# Altium PCB PCB.PcbDoc
Units mm, origin at the board's own origin, x right, y up, seen from the top; angles counter-clockwise.
Board outline 95.1 x 85.5 mm, 4 copper layers (Signal Top, Int1 (GND), Int2 (PWR), Signal Bottom), stack 1.696 mm thick; 125 components, 91 nets, 430 pads, 70 vias.
Unrouted connection lines stored in the file: 163.
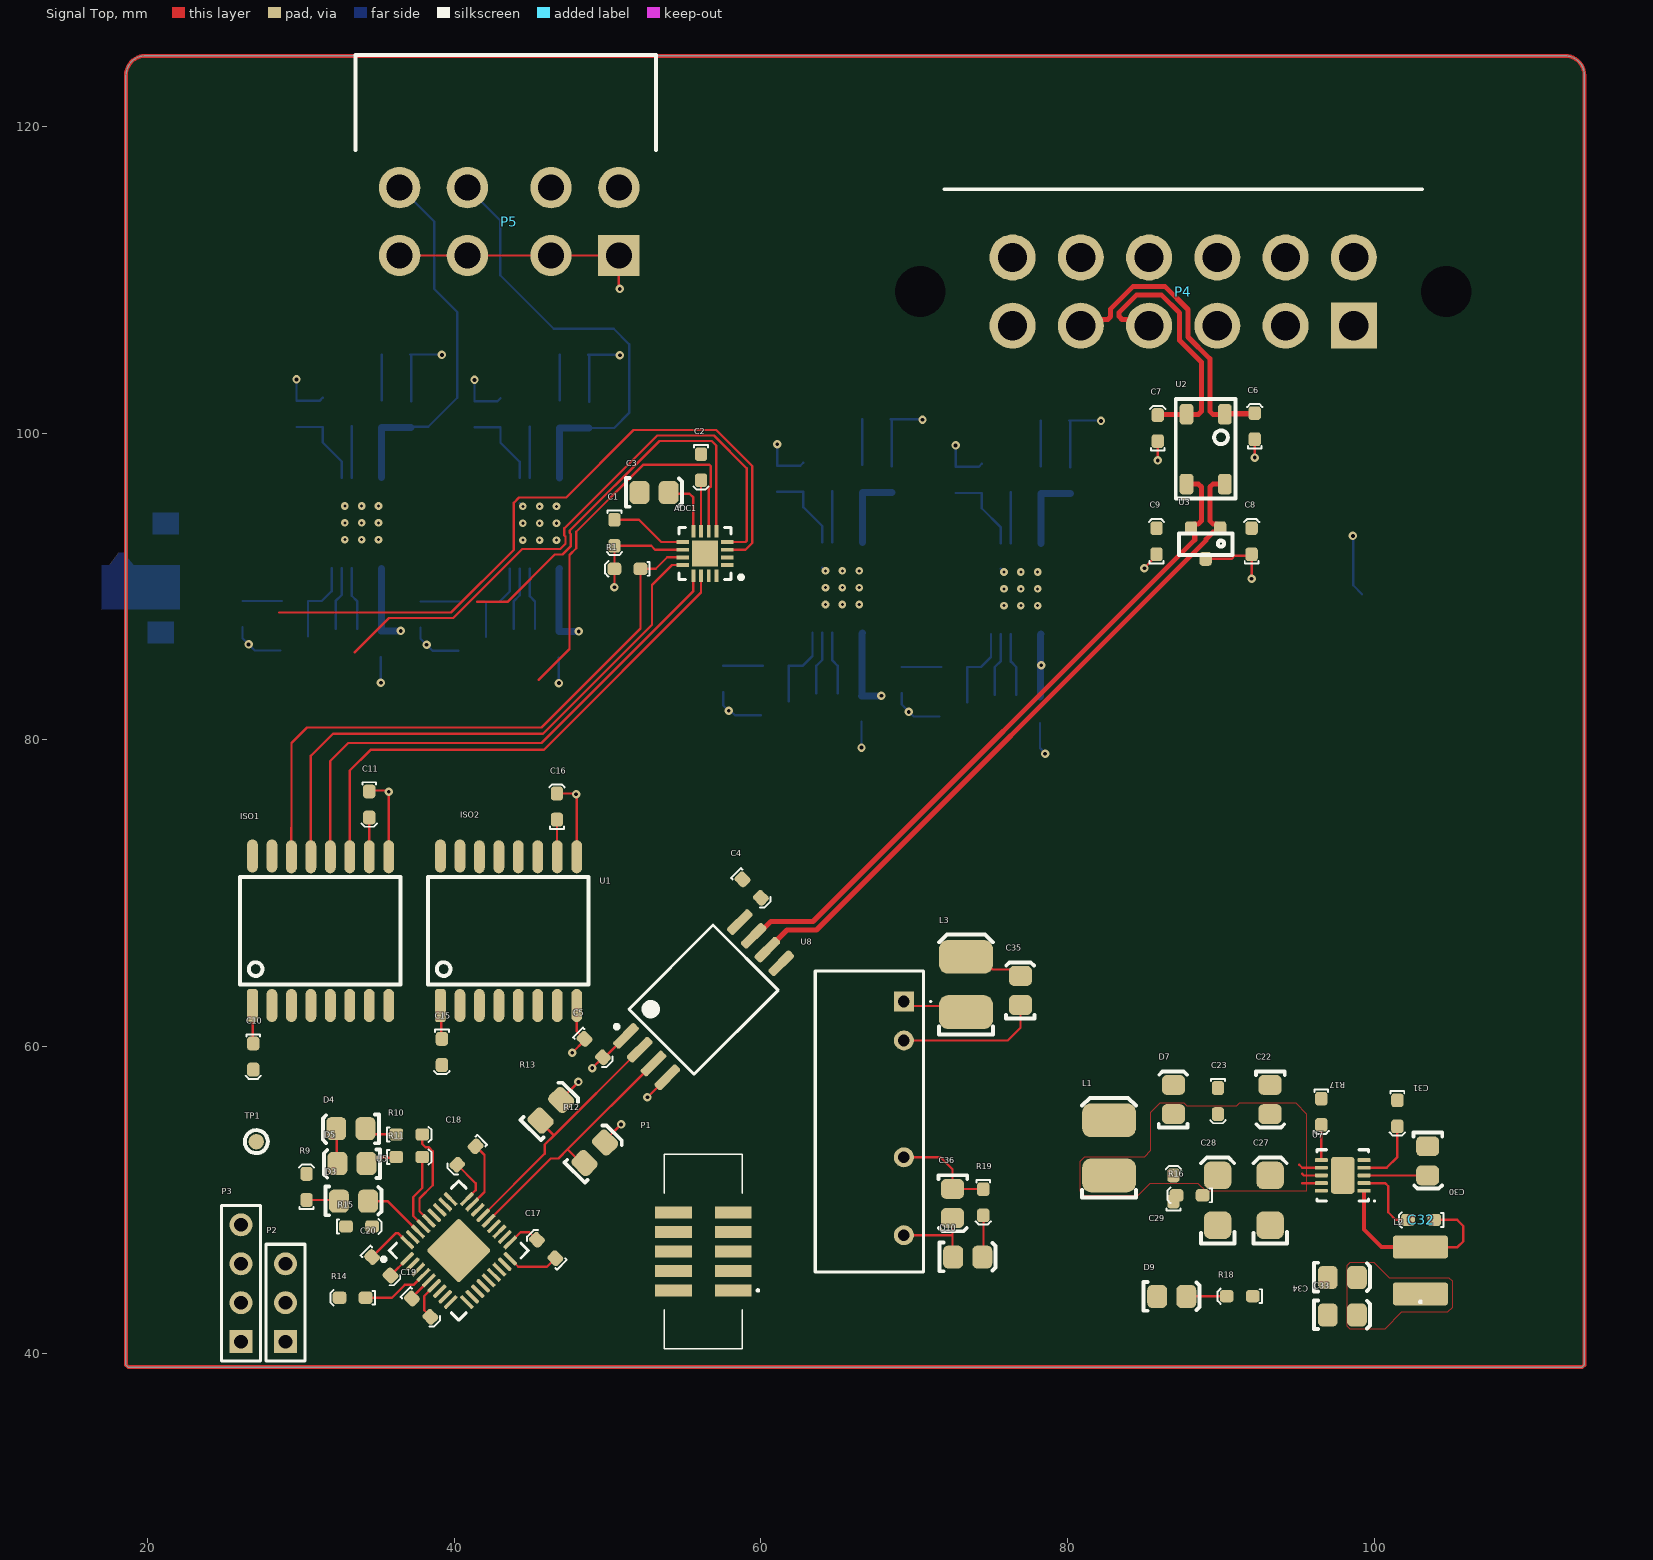
[diagram p0: Signal Top view]
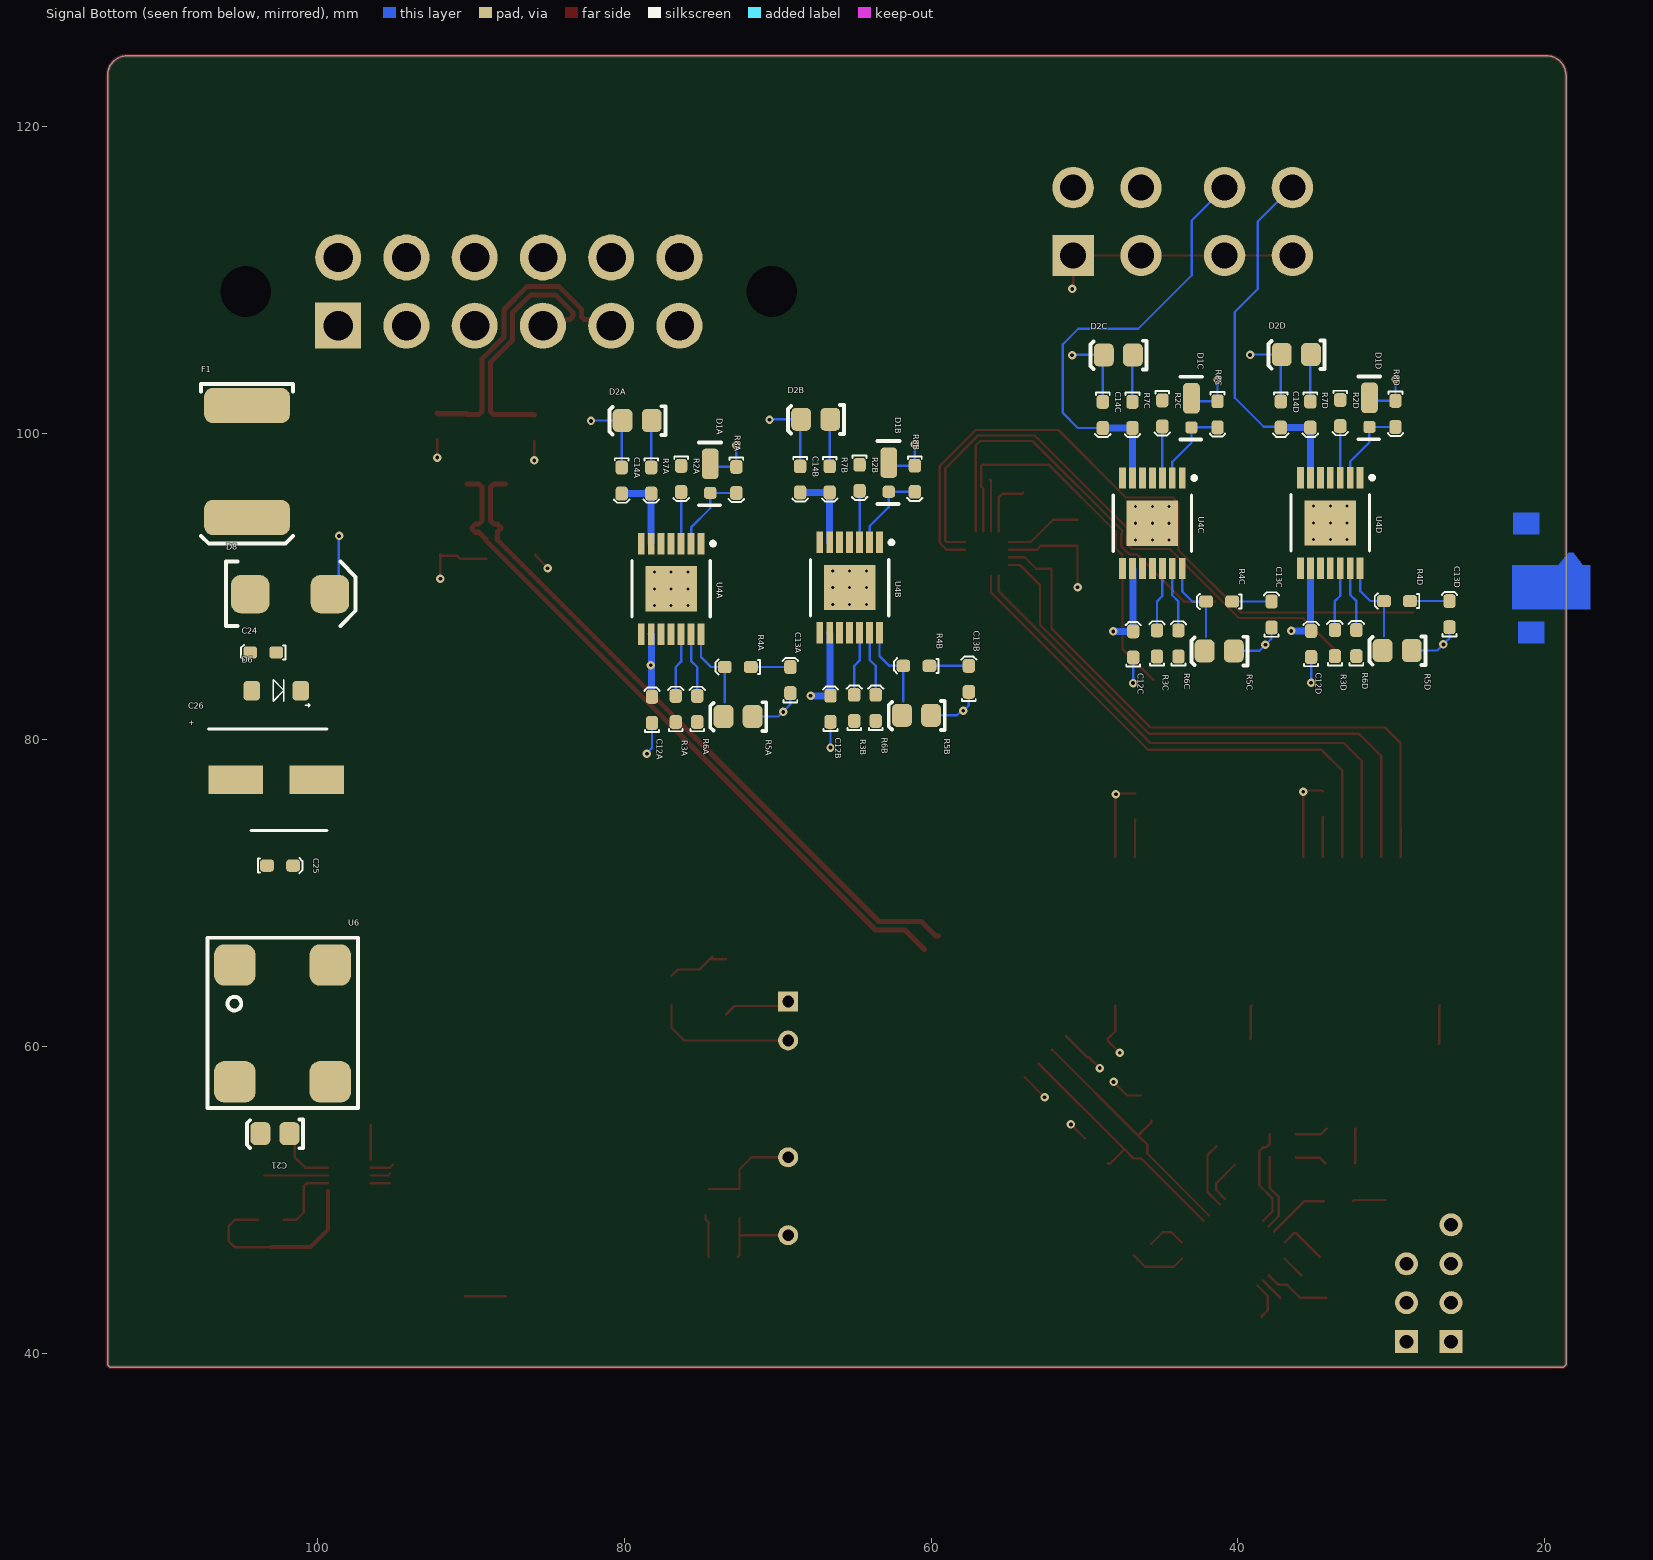
[diagram p1: Signal Bottom view, seen from below]
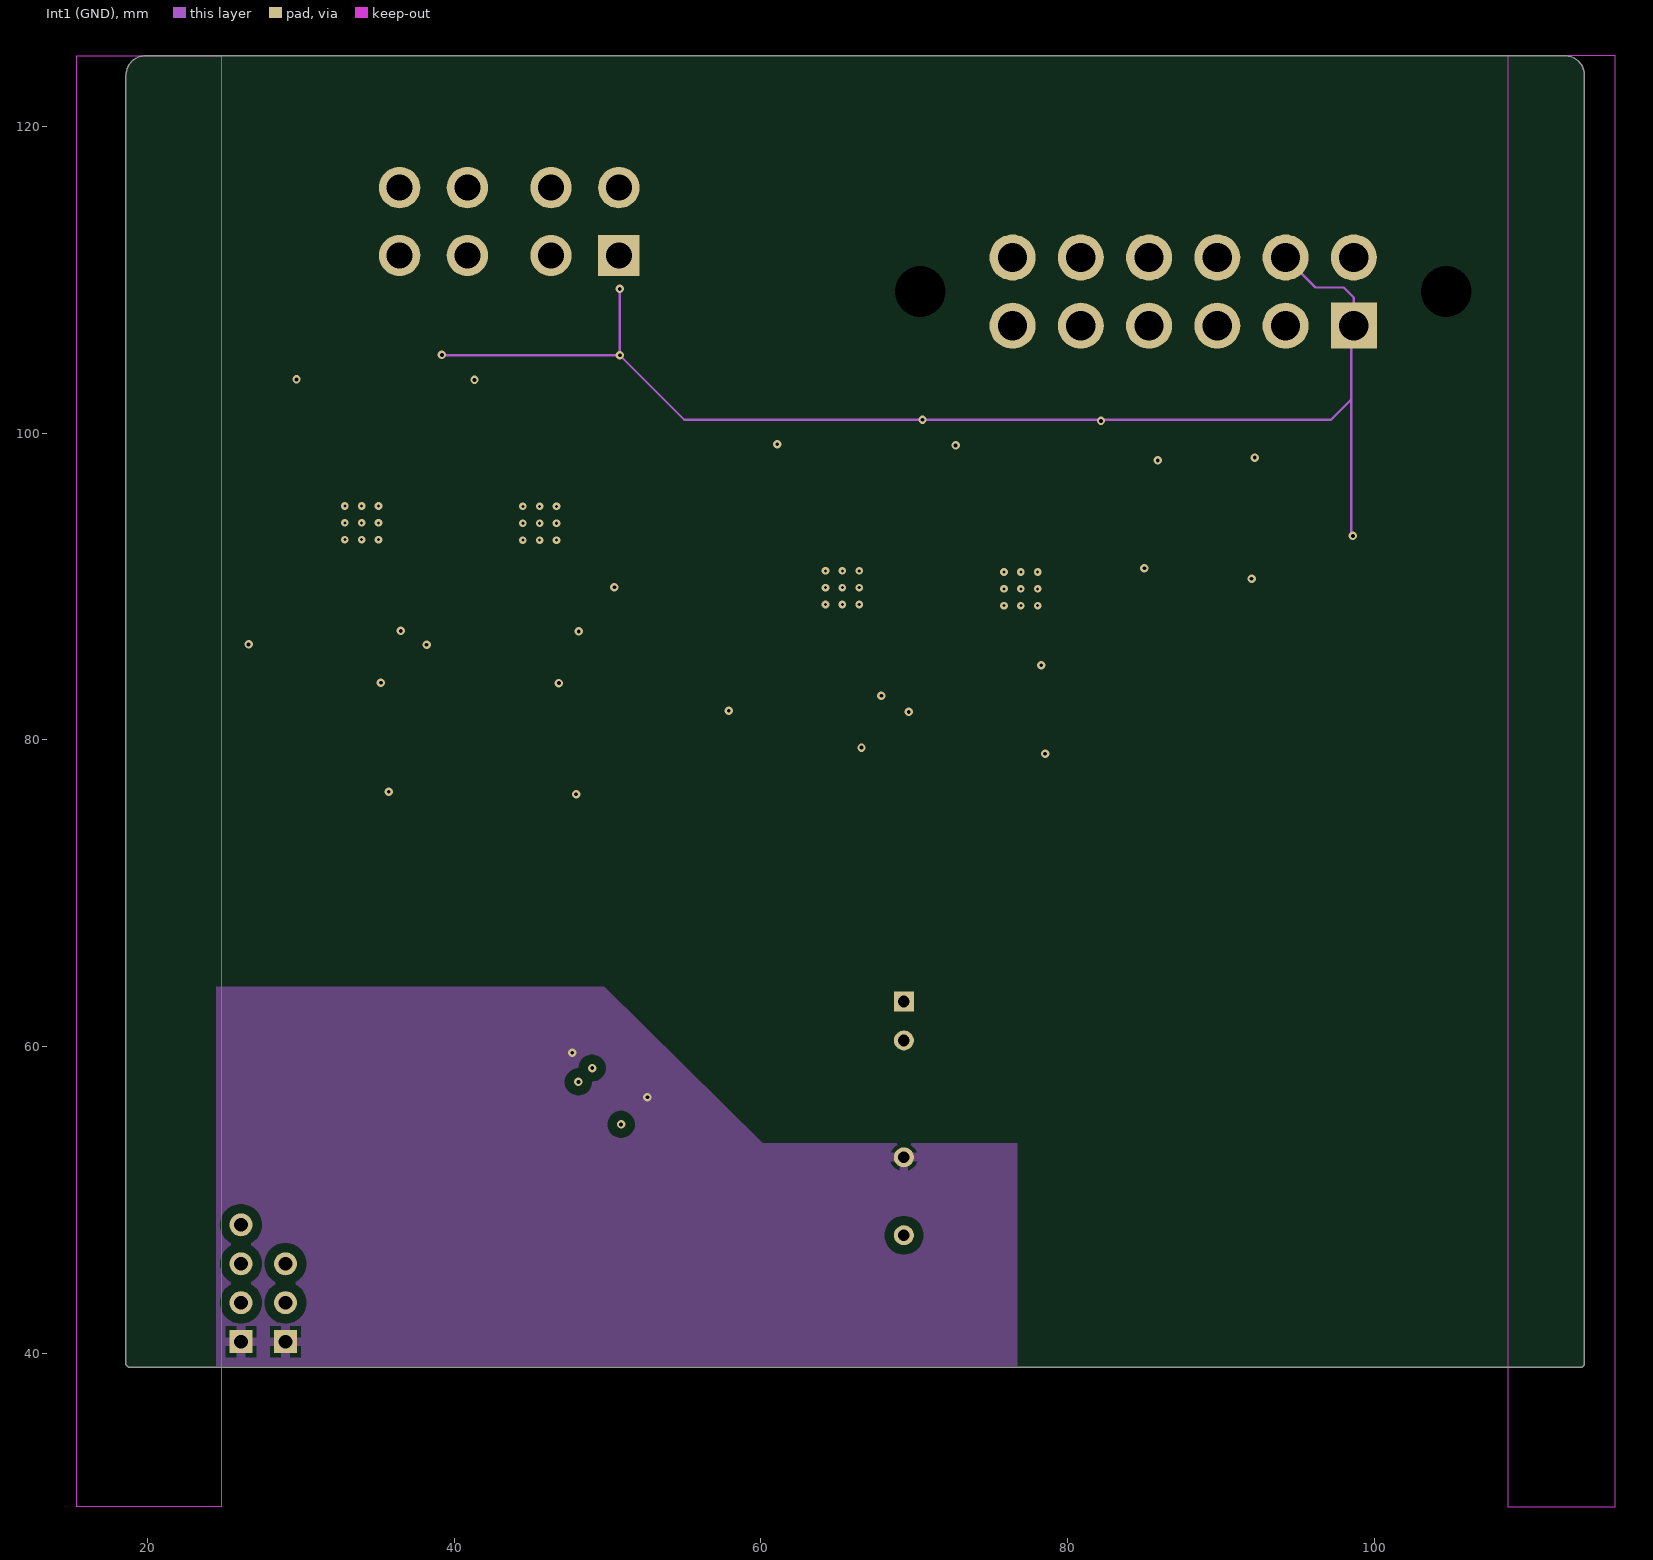
[diagram p2: Int1 (GND)]
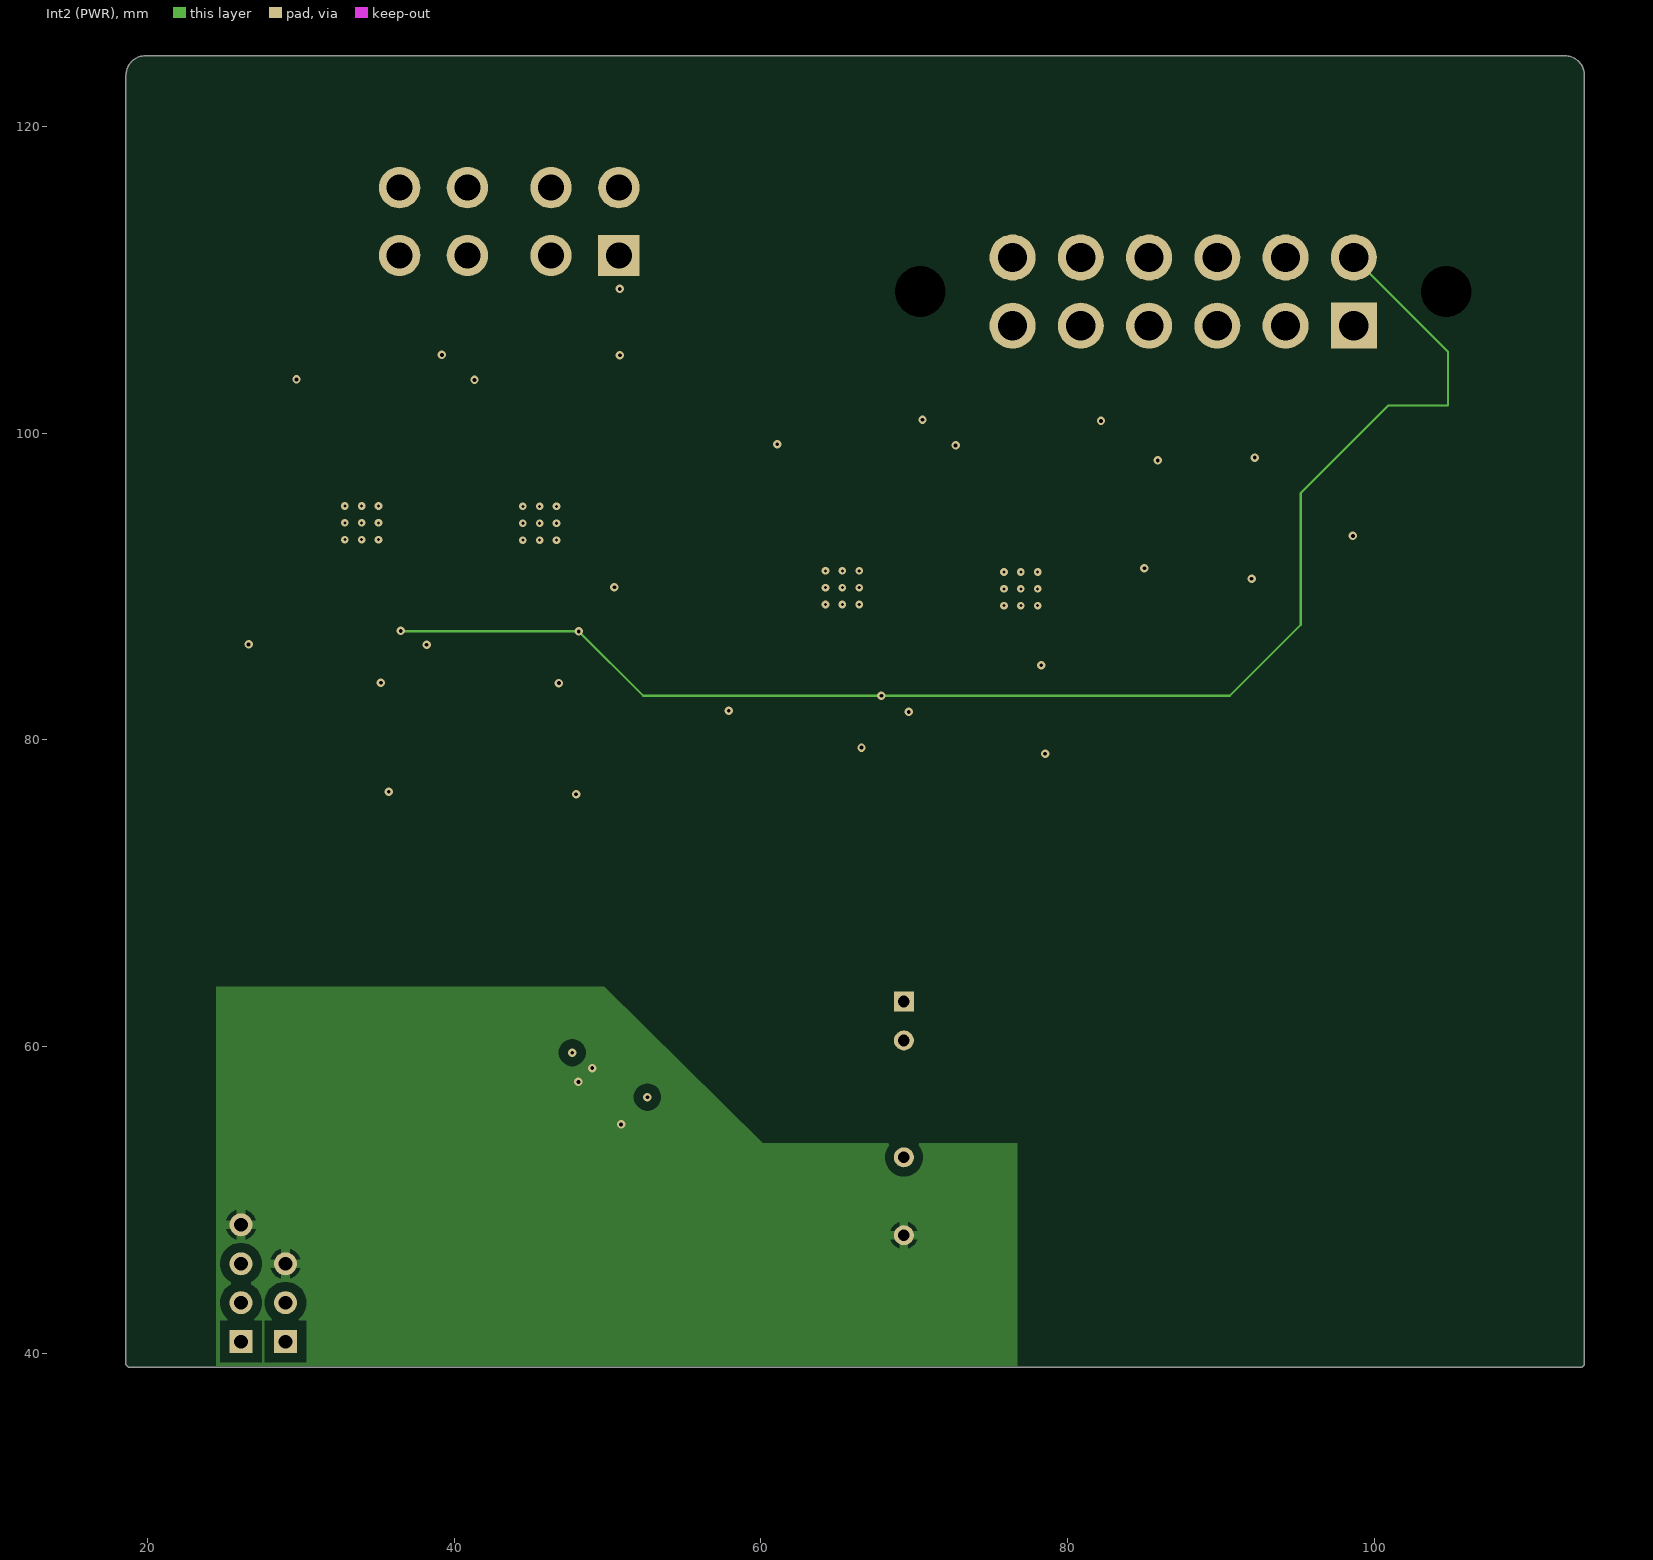
[diagram p3: Int2 (PWR)]

## Layer stack, top to bottom
Top Solder: solder mask 0.0254, SM-003, Dk 4
Signal Top: signal copper 0.07
Dielectric 1: prepreg 0.2104, PP-017, Dk 4.4
Int1 (GND): signal copper 0.035
Dielectric 2: core 1.065, Core-039, Dk 4.5
Int2 (PWR): signal copper 0.035
Dielectric 3: prepreg 0.2104, PP-017, Dk 4.4
Signal Bottom: signal copper 0.07
Bottom Solder: solder mask 0.0254, SM-003, Dk 4

## Board outline
18.749,39.1 18.6,39.249 18.6,123.33 cw(c19.87,123.33) 19.87,124.6 112.43,124.6 cw(c112.43,123.33) 113.7,123.33 113.7,39.249 113.551,39.1

## Design rules (kind name [scope] priority, off if disabled: settings)
Clearance [All] p1: gap=0.254 ignorepadtopadclearanceinfootprint=FALSE except(0: Arc-Hole Track-Hole SMDPad-Hole THPad-Hole Via-Hole Fill-Hole Region-Hole Text-Hole; 0.1: THPad-THPad; 0.152: Arc-SMDPad Track-SMDPad SMDPad-SMDPad; 0.2: Arc-THPad Track-THPad SMDPad-THPad THPad-Via; 0.203: Arc-Arc Arc-Track Arc-Region Track-Track Track-Region SMDPad-Region THPad-Region Via-Region Fill-Region Poly-Region Region-Region; 0.6: Arc-Poly Track-Poly SMDPad-Poly THPad-Poly Via-Poly Fill-Poly Poly-Poly)
DiffPairsRouting [All] p1: maxlimit=0.22 minlimit=0.22 mostfreqgap=0.22 toplayer_minwidth=0.33 toplayer_maxwidth=0.33 toplayer_prefwidth=0.33 midlayer1_minwidth=0.33 midlayer1_maxwidth=0.33 midlayer1_prefwidth=0.33 midlayer2_minwidth=0.33 midlayer2_maxwidth=0.33 midlayer2_prefwidth=0.33 bottomlayer_minwidth=0.33 bottomlayer_maxwidth=0.33 bottomlayer_prefwidth=0.33 maxuncoupledlength=12.7
Height [All] p1: minheight=0 maxheight=50 prefheight=12.7
HoleSize [All] p1: absolutevalues=TRUE maxlimit=10 minlimit=0.025 maxpercent=80.000 minpercent=20.000
MinimumSolderMaskSliver [All] p1 off: minsoldermaskwidth=0.254
NetAntennae [All] p1 off: netantennaetolerance=0
PlaneClearance [All] p1: clearance=0.4
PlaneConnect [All] p1: pad.planeconnectstyle=Relief pad.reliefexpansion=0.508 pad.reliefentries=4 pad.reliefconductorwidth=0.8 pad.reliefairgap=0.254 via.planeconnectstyle=Direct via.reliefexpansion=0.508 via.reliefentries=4 via.reliefconductorwidth=0.8 via.reliefairgap=0.254
PolygonConnect [All] p1: thpad.connectstyle=Relief thpad.reliefconductorwidth=0.6 thpad.reliefentries=4 thpad.polygonreliefangle="90 Angle" thpad.airgapwidth=0.254 smdpad.connectstyle=Relief smdpad.reliefconductorwidth=0.6 smdpad.reliefentries=4 smdpad.polygonreliefangle="90 Angle" smdpad.airgapwidth=0.254 via.connectstyle=Direct via.reliefconductorwidth=0.6 via.reliefentries=4 via.polygonreliefangle="90 Angle" via.airgapwidth=0.254
RoomDefinition "IPT FILTER + PROC" [InComponentClass('Power Supply')] p1: confinementstyle=ConfineIn formatcopy=TRUE lockcomponents=FALSE outline 96.9,55.6 116.2,55.6 116.2,103.6 96.9,103.6
RoomDefinition "24V-5V REG" [InComponentClass('Power Supply2')] p2: confinementstyle=ConfineIn formatcopy=TRUE lockcomponents=FALSE outline 107.4,41.1 107.4,58.8 80.5,58.8 80.5,41.1
RoomDefinition CAN [InComponentClass('CAN')] p3: confinementstyle=ConfineIn formatcopy=TRUE lockcomponents=FALSE outline 46.66,50.96 58.9,63.2 61.5,60.6 87.91,86.337 87.959,89.8 84.4,89.8 84.4,102.5 93.6,102.5 93.6,89.8 90.1,89.8 90.1,85.5 62.3,57.7 64,56 53.011,45.011
RoomDefinition HSD1D [InComponentClass('HSD1D')] p4: confinementstyle=ConfineIn formatcopy=TRUE lockcomponents=TRUE outline 25.4,86.6 28.7,83.3 36.1,83.3 37,84.2 37,98.5 39.7,101.2 39.7,105.8 39.2,106.3 31.6,106.3 28.8,103.5 28.8,93.1 25.4,89.7
RoomDefinition HSD1A [InComponentClass('HSD1A')] p5: confinementstyle=ConfineIn formatcopy=TRUE lockcomponents=FALSE outline 68.377,82.3 71.677,79 79.077,79 79.977,79.9 79.977,94.2 82.677,96.9 82.677,101.5 82.177,102 74.577,102 71.777,99.2 71.777,88.8 68.377,85.4
RoomDefinition Microcontroller [InComponentClass('Microcontroller')] p6: confinementstyle=ConfineIn formatcopy=TRUE lockcomponents=FALSE outline 24.376,38.956 24.376,49.824 25.969,54.931 31.067,55.956 46.915,58.343 61.154,54.294 61.154,38.986 27.624,38.956
RoomDefinition 5V-3V3 [InComponentClass('Power Supply1')] p7: confinementstyle=ConfineIn formatcopy=TRUE lockcomponents=FALSE outline 62.2,43.9 78.3,43.9 78.3,67.7 62.2,67.7
RoomDefinition HSD1B [InComponentClass('HSD1B')] p8: confinementstyle=ConfineIn formatcopy=TRUE lockcomponents=FALSE outline 56.739,82.374 60.039,79.074 67.439,79.074 68.339,79.974 68.339,94.274 71.039,96.974 71.039,101.574 70.539,102.074 62.939,102.074 60.139,99.274 60.139,88.874 56.739,85.474
RoomDefinition HSD1C [InComponentClass('HSD1C')] p9: confinementstyle=ConfineIn formatcopy=TRUE lockcomponents=FALSE outline 37.003,86.574 40.303,83.274 47.703,83.274 48.603,84.174 48.603,98.474 51.303,101.174 51.303,105.774 50.803,106.274 43.203,106.274 40.403,103.474 40.403,93.074 37.003,89.674
RoomDefinition "High-Side Driver Enable Pin Isolator" [InComponentClass('High-Side Driver Enable Pin Isolator')] p10: confinementstyle=ConfineIn formatcopy=TRUE lockcomponents=FALSE outline 37.909,60.671 37.909,74.433 45.869,77.431 47.531,77.431 49.135,74.433 49.135,60.671 40.031,57.869 38.369,57.869
RoomDefinition ADC1 [InComponentClass('ADC1')] p11: confinementstyle=ConfineIn formatcopy=TRUE lockcomponents=FALSE outline 49.55,97.35 51.65,99.45 57.75,99.45 59.05,98.15 59.05,89.75 58.15,88.85 50.55,88.85 50.55,88.95 49.55,89.95
RoomDefinition TopLevel [InComponentClass('TopLevel')] p12: confinementstyle=ConfineIn formatcopy=TRUE lockcomponents=FALSE outline 24.963,109.038 24.963,139.446 108.589,139.446 108.589,104.648 66.501,104.648 66.501,109.038
RoomDefinition "Contoller Peripheral Comms Isolation" [InComponentClass('Contoller Peripheral Comms Isolation')] p13: confinementstyle=ConfineIn formatcopy=TRUE lockcomponents=FALSE outline 25.651,60.671 25.651,74.433 33.634,77.553 35.296,77.553 36.878,74.433 36.878,60.671 27.731,57.569 26.069,57.569
RoutingVias [All] p1: holewidth=0.25 width=0.55 viastyle="Through Hole" minholewidth=0.203 minwidth=0.254 maxholewidth=0.711 maxwidth=1.27
SilkToSilkClearance [All] p1 off: silktosilkclearance=0.254
SilkToSolderMaskClearance [IsPad] p1 off: minsilkscreentomaskgap=0.254 clearancetoexposedcopper=TRUE
SolderMaskExpansion [All] p1: expansion=0.051 istentingtop=FALSE
SupplyNets "Schematic Supply Nets_8" [InNet('0V')] p1: voltage=0.000
SupplyNets "Schematic Supply Nets_7" [InNet('3V3')] p2: voltage=0.000
SupplyNets "Schematic Supply Nets_6" [InNet('0V_(ISO)')] p3: voltage=0.000
SupplyNets "Schematic Supply Nets_5" [InNet('VBAT_F')] p4: voltage=0.000
SupplyNets "Schematic Supply Nets_4" [InNet('VBAT_C')] p5: voltage=0.000
SupplyNets "Schematic Supply Nets_3" [InNet('GLV+')] p6: voltage=0.000
SupplyNets "Schematic Supply Nets_2" [InNet('5V')] p7: voltage=0.000
SupplyNets "Schematic Supply Nets_1" [InNet('GLV-')] p8: voltage=0.000
SupplyNets "Schematic Supply Nets" [InNet('VBAT_D')] p9: voltage=0.000
Width [All] p1: maxlimit=3 minlimit=0.127 preferedwidth=0.152 minimp=50.000000 maximp=50.000000 favimp=50.000000
21 further rules are at their usual default settings.

## Classes and differential pairs
component class "Power Supply2": C22 C23 C27 C28 C29 C30 C31 C32 C33 C34 D7 D9 L1 L2 R17 R18 U7
component class "Power Supply1": C35 C36 D10 L3 R19 U8
component class HSD1C: C12C C13C C14C D1C D2C R2C R3C R4C R5C R6C R7C R8C U4C
component class HSD1B: C12B C13B C14B D1B D2B R2B R3B R4B R5B R6B R7B R8B U4B
component class HSD1A: C12A C13A C14A D1A D2A R2A R3A R4A R5A R6A R7A R8A U4A
component class ADC1: ADC1 C1 C2 C3 R1
channel class "High-Side Driver": HSD1A HSD1B HSD1C HSD1D
component class TopLevel: P4 P5
component class "Power Supply": C21 C24 C25 C26 D6 D8 F1 R16 U6
component class Microcontroller: C17 C18 C19 C20 D3 D4 D5 P1 P2 P3 R9 R10 R11 R12 R13 R14 R15 TP1 U5
component class HSD1D: *_HSD2 C12D C13D C14D D1D D2D R2D R3D R4D R5D R6D R7D R8D U4D
component class "High-Side Driver Enable Pin Isolator": C15 C16 ISO2
component class "Contoller Peripheral Comms Isolation": C10 C11 ISO1
component class CAN: C4 C5 C6 C7 C8 C9 U1 U2 U3
differential pair CAN1: +CAN1_P -CAN1_N
differential pair _CAN1: +_CAN1_P -_CAN1_N

## Components (designator, comment, footprint, x,y, rotation, side; value= is the part's Value field where it differs from the comment)
ADC1 "ADS7028IRTER-Symbol-1" WFQN-16 56.35,92.15 r180 top
C1 "100nF" 0603 50.45,94.35 r270 top
C2 "100nF" 0603 56.1,98.625 r270 top
C3 "1µF" 0805 53.05,96.15 r0 top
C4 "100nF" 0603 58.8,70.9 r315 top
C5 "100nF" 0603 48.5,60.5 r315 top
C6 "100pF" 0603 92.2,99.6 r90 top
C7 "100pF" 0603 85.875,99.475 r90 top
C8 "100pF" 0603 92,92.1 r90 top
C9 "100pF" 0603 85.8,92.1 r90 top
C10 "100nF" 0603 26.9,60.2 r270 top
C11 "100nF" 0603 34.465,76.635 r270 top
C12A "100nF" 0603 78.2,81.1 r90 bottom (schematic designator C12)
C12B "100nF" 0603 66.562,81.174 r90 bottom (schematic designator C12)
C12C "100nF" 0603 46.826,85.374 r90 bottom (schematic designator C12)
C12D "100nF" 0603 35.223,85.4 r90 bottom (schematic designator C12)
C13A "100nF" 0603 69.177,83.05 r90 bottom (schematic designator C13)
C13B "100nF" 0603 57.539,83.124 r90 bottom (schematic designator C13)
C13C "100nF" 0603 37.803,87.324 r90 bottom (schematic designator C13)
C13D "100nF" 0603 26.2,87.35 r90 bottom (schematic designator C13)
C14A "22nF" 0603 80.177,97.761 r270 bottom (schematic designator C14)
C14B "22nF" 0603 68.539,97.835 r270 bottom (schematic designator C14)
C14C "22nF" 0603 48.803,102.035 r270 bottom (schematic designator C14)
C14D "22nF" 0603 37.2,102.061 r270 bottom (schematic designator C14)
C15 "100nF" 0603 39.2,60.5 r270 top
C16 "100nF" 0603 46.7,74.8 r90 top
C17 "100nF" 0603 46.6,46.2 r135 top
C18 "100nF" 0603 41.4,53.5 r225 top
C19 "100nF" 0603 37.248,43.577 r315 top
C20 "100nF" 0603 34.648,46.277 r315 top
C21 "10uF" 0805 102.8,54.3 r0 bottom
C22 "10uF" 0805 93.226,56.538 r270 top
C23 "100nF" 0603 89.8,57.3 r270 top
C24 "100nF" 0603 102.7,85.7 r0 bottom
C25 "100nF" 0603 103.3,71.8 r180 bottom
C26 "47uF" "CHEMI-CON ELCO" 102.7,77.4 r180 bottom
C27 "4.7uF" "1206 CAP" 93.205,51.16 r90 top
C28 "4.7uF" "1206 CAP" 89.78,51.16 r90 top
C29 "100nF" 0603 86.9,49.9 r90 top
C30 "1µF" 0805 103.5,52.538 r270 top
C31 "10nF" 0603 101.5,56.5 r270 top
C32 "100nF" 0603 103.9,48.7 r180 top
C33 "10uF" 0805 97.923,42.525 r0 top
C34 "10uF" 0805 97.923,44.975 r0 top
C35 "10uF" 0805 76.9,63.675 r90 top
C36 "10uF" 0805 72.524,49.762 r270 top
D1A "MSX1PJ-M3/89A" "VISHAY DO-219" 74.4,98 r270 bottom (schematic designator D1)
D1B "MSX1PJ-M3/89A" "VISHAY DO-219" 62.762,98.074 r270 bottom (schematic designator D1)
D1C "MSX1PJ-M3/89A" "VISHAY DO-219" 43.026,102.274 r270 bottom (schematic designator D1)
D1D "MSX1PJ-M3/89A" "VISHAY DO-219" 31.423,102.3 r270 bottom (schematic designator D1)
D2A "Green" "0805 LED" 79.177,100.8 r0 bottom (schematic designator D2)
D2B "Green" "0805 LED" 67.539,100.874 r0 bottom (schematic designator D2)
D2C "Green" "0805 LED" 47.803,105.074 r0 bottom (schematic designator D2)
D2D "Green" "0805 LED" 36.2,105.1 r0 bottom (schematic designator D2)
D3 "Yellow" "0805 LED" 33.45,49.95 r0 top
D4 "Yellow" "0805 LED" 33.25,54.625 r180 top
D5 "Yellow" "0805 LED" 33.325,52.35 r180 top
D6 "PMEG100T10ELR-QX" "NXP SOD123W" 102.7,83.2 r0 bottom
D7 "Red" "0805 LED" 86.874,56.562 r90 top
D8 "SM6T36CAY" "ST SMB DIODE" 101.8,89.5 r0 bottom
D9 "Red" "0805 LED" 86.802,43.726 r0 top
D10 "Red" "0805 LED" 73.5,46.3 r0 top
F1 "0ZCF0100AF2A" 2920 104.6,101.8 r270 bottom
ISO1 "ADum1401" "AD 16-SOIC" 32.56,67.552 r0 top
ISO2 "ADuM1400" "AD 16-SOIC" 44.817,67.552 r0 top
L1 "12uH" 1812 82.7,53.4 r90 top
L2 "4.7uH" SRN3015TA-4R7M 103,45.4 r90 top
L3 "12uH" 1812 73.375,64.05 r90 top
P1 "1.27mm" 3221-10-0300-00 56.25,46.64 r90 top
P2 "2.54mm" "TH 2.54mm Header 1x3" 29,40.76 r90 top
P3 "2.54mm" "TH 2.54mm Header 1x4" 26.1,40.76 r90 top
P4 "DTF13-12P" DTF13-12P 87.545,111.452 r180 top
P5 "ATF13-08" ATF13-08 43.592,113.792 r180 top
R1 "100K" 0603 52.15,91.15 r180 top
R2A "10k" 0603 76.3,97.861 r270 bottom (schematic designator R2)
R2B "10k" 0603 64.662,97.935 r270 bottom (schematic designator R2)
R2C "10k" 0603 44.926,102.135 r270 bottom (schematic designator R2)
R2D "10k" 0603 33.323,102.161 r270 bottom (schematic designator R2)
R3A "10k" 0603 76.65,81.161 r90 bottom (schematic designator R3)
R3B "10k" 0603 65.012,81.235 r90 bottom (schematic designator R3)
R3C "10k" 0603 45.276,85.435 r90 bottom (schematic designator R3)
R3D "10k" 0603 33.673,85.461 r90 bottom (schematic designator R3)
R4A "10k" 0603 71.75,84.75 r0 bottom (schematic designator R4)
R4B "10k" 0603 60.112,84.824 r0 bottom (schematic designator R4)
R4C "10k" 0603 40.376,89.024 r0 bottom (schematic designator R4)
R4D "10k" 0603 28.773,89.05 r0 bottom (schematic designator R4)
R5A "390R" 0805 72.6,81.5 r0 bottom (schematic designator R5)
R5B "390R" 0805 60.962,81.574 r0 bottom (schematic designator R5)
R5C "390R" 0805 41.226,85.774 r0 bottom (schematic designator R5)
R5D "390R" 0805 29.623,85.8 r0 bottom (schematic designator R5)
R6A "680R" 0603 75.25,81.161 r90 bottom (schematic designator R6)
R6B "680R" 0603 63.612,81.235 r90 bottom (schematic designator R6)
R6C "680R" 0603 43.876,85.435 r90 bottom (schematic designator R6)
R6D "680R" 0603 32.273,85.461 r90 bottom (schematic designator R6)
R7A "1k" 0603 78.25,97.761 r270 bottom (schematic designator R7)
R7B "1k" 0603 66.612,97.835 r270 bottom (schematic designator R7)
R7C "1k" 0603 46.876,102.035 r270 bottom (schematic designator R7)
R7D "1k" 0603 35.273,102.061 r270 bottom (schematic designator R7)
R8A "1k" 0603 72.7,97.8 r270 bottom (schematic designator R8)
R8B "1k" 0603 61.062,97.874 r270 bottom (schematic designator R8)
R8C "1k" 0603 41.326,102.074 r270 bottom (schematic designator R8)
R8D "1k" 0603 29.723,102.1 r270 bottom (schematic designator R8)
R9 "500R" 0603 30.375,50 r90 top
R10 "500R" 0603 36.225,54.275 r0 top
R11 "500R" 0603 36.225,52.8 r0 top
R12 "5.1k" 0805 49.162,53.099 r45 top
R13 "5.1k" 0805 46.298,55.873 r45 top
R14 "10k" 0603 34.225,43.625 r180 top
R15 "10k" 0603 32.95,48.275 r0 top
R16 "20K" 0603 88.8,50.3 r180 top
R17 "100K" 0603 96.54,56.6 r270 top
R18 "2K" 0603 92.075,43.726 r180 top
R19 "1k" 0603 74.5,50.7 r270 top
TP1 "Test Point Small" "SMD Test Point 1mm" 27.1,53.8 r0 top
U1 "ISO1042" TI-SOIC-8 56.263,63.061 r45 top
U2 "B82787C0104H002" "TDK 4-PC Pad" 90.25,101.225 r270 top value="100µH @ 100kHz"
U3 "NUP2105L" "ON SOT-23" 89,92.8 r180 top
U4A "TPS1H100AQPWPRQ1" TI_14_TSSOP 76.95,89.85 r270 bottom (schematic designator U4)
U4B "TPS1H100AQPWPRQ1" TI_14_TSSOP 65.312,89.924 r270 bottom (schematic designator U4)
U4C "TPS1H100AQPWPRQ1" TI_14_TSSOP 45.576,94.124 r270 bottom (schematic designator U4)
U4D "TPS1H100AQPWPRQ1" TI_14_TSSOP 33.973,94.15 r270 bottom (schematic designator U4)
U5 "STM32F103T8U6" STM_QFN-36 40.3,46.7 r45 top
U6 "744272121" "Wurth 4-PC Pad" 99.18,57.7 r90 bottom value="120uH @ 100kHz"
U7 "LM536015QDSXRQ1" TI_10_WSON 97.935,51.6 r180 top
U8 "RK-053.3S/H6" RK-053.3S/H6 69.325,62.94 r270 top

## Footprints (in the part's own frame and the unit in brackets; to place one, negate y for a bottom-side part, rotate by r counter-clockwise, add the part's x,y. Pads: shape width x height; smd on the part's side, far side on the other; paste and mask are expansions set on the pad)
0603 [mm]
  rrect50% 0.9x0.8 smd: 1(0,0) 2(1.7,0)
  silkscreen extent -0.6,-0.5 2.3,0.5, body extent 0.05,-0.42 1.65,0.43, height 0.6
0805 [mm]
  rrect50% 1.3x1.5 smd: 1(-0.962,-0.026) 2(0.938,-0.026)
  silkscreen extent -1.85,-0.95 1.8,0.93, body extent -1,-0.65 1,0.66, height 0.73
"0805 LED" [mm]
  rrect50% 1.3x1.5 smd: A(-0.962,-0.026) K(0.938,-0.026)
  silkscreen extent -1.85,-0.95 1.8,0.93, body extent -1.09,-0.63 0.91,0.63, height 1
"1206 CAP" [mm]
  rrect50% 1.8x1.8 smd: 1(-2.81,0) 2(0.44,0)
  silkscreen extent -3.99,-1.09 1.62,1.09, body extent -2.75,-0.79 0.45,0.81, height 1.61
1812 [mm]
  rrect50% 2.2x3.5 smd: 1(-1.8,0) 2(1.8,0)
  silkscreen extent -3.25,-1.75 3.25,1.75, body extent -2.25,-1.6 2.25,1.6, height 2.5
2920 [mm]
  rrect50% 2.3x5.6 smd: 1(0,0) 2(7.3,0)
  silkscreen extent -1.4,-3 9,3, body extent -0.34,-2.81 7.64,2.81, height 1.14
3221-10-0300-00 [mm]
  rect 0.76x2.4 smd: 1(-2.54,-1.95) 2(-2.54,1.95) 3(-1.27,-1.95) 4(-1.27,1.95) 5(0,-1.95) 6(0,1.95) 7(1.27,-1.95) 8(1.27,1.95) 9(2.54,-1.95) 10(2.54,1.95)
  silkscreen extent -6.35,-3.6 6.35,2.55, body extent -6.34,-2.8 6.36,2.8, height 5.25
"AD 16-SOIC" [mil]
  rrect50% 28x85 smd: 1(-225,-192.02)
  oval 28x85 smd: 2(-175,-192.02) 3(-125,-192.02) 4(-75,-192.02) 5(-25,-192.02) 6(25,-192.02) 7(75,-192.02) 8(125,-192.02) 9(125,190) 10(75,189.96) 11(25,189.96) 12(-25,189.96) 13(-75,189.96) 14(-125,189.96) 15(-175,191.98) 16(-225,191.98)
  silkscreen extent -257,-138 155,138, body extent -256,-209 156,209, height 104
ATF13-08 [mm]
  rect 2.7x2.7 hole 1.7: 1(-7.145,2.21)
  round 2.7 hole 1.7: 2(-2.725,2.21) 3(2.725,2.21) 4(7.145,2.21) 5(7.145,-2.21) 6(2.725,-2.21) 7(-2.725,-2.21) 8(-7.145,-2.21)
  silkscreen extent -9.57,-10.87 10.03,-4.67, body extent -18.38,-25.4 18.38,4.5, height 23.66
"CHEMI-CON ELCO" [mm]
  rect 3.55x1.85 smd: 1(-2.65,0) 2(2.65,0)
  silkscreen extent -4.43,-3.3 3.3,3.3, body extent -3.7,-3.4 3.7,3.4, height 6.1
DTF13-12P [mm]
  round 3 hole 3.3 unplated: 0(-17.145,2.22) 0(17.145,2.22)
  rect 3x3 hole 1.9: 1(-11.114,4.45)
  round 3 hole 1.9: 2(-6.664,4.45) 3(-2.214,4.45) 4(2.236,4.45) 5(6.686,4.45) 6(11.136,4.45) 7(11.136,0) 8(6.686,0) 9(2.236,0) 10(-2.214,0) 11(-6.664,0) 12(-11.114,0)
  silkscreen extent -15.56,-4.45 15.59,-4.45, body extent -20.79,-27.74 20.79,6.55, height 23.13
"NXP SOD123W" [mm]
  rrect50% 1.1x1.3 smd: A(1.6,0) K(-1.6,0)
  silkscreen extent -2.2,-0.73 0.2,1.04, body extent -1.75,-0.95 1.75,0.95, height 1.1
"ON SOT-23" [mm] "NUP2105L"
  rrect50% 0.8x0.9 smd: 1(-0.95,-1) 2(0.95,-1) 3(0,1)
  silkscreen extent -1.75,-0.65 1.75,0.75, body extent -1.5,-1.27 1.5,1.28, height 1
RK-053.3S/H6 [mm]
  rect 1.303x1.303 hole 0.76: 1(0,0)
  round 1.303 hole 0.76: 2(2.54,0) 5(10.16,0) 7(15.24,0)
  silkscreen extent -2,-5.78 17.65,1.8, body extent -1.99,-5.78 17.65,1.26, height 10.2
"SMD Test Point 1mm" [mm]
  round 1 smd: 1(0,0)
  silkscreen extent -0.75,-0.75 0.75,0.75
SRN3015TA-4R7M [mm]
  rrect25% 1.5x3.6 smd: 1(-1.525,0) 2(1.525,0)
  silkscreen extent -2.1,-0.05 -2,0.05, body extent -1.46,-1.47 1.61,1.47, height 1.4
"ST SMB DIODE" [mm]
  rrect50% 2.5x2.5 smd: A(2.6,0) K(-2.6,0)
  silkscreen extent -4.28,-2.12 4.17,2.08, body extent -2.88,-1.99 2.72,1.95, height 2.5
STM_QFN-36 [mm]
  rrect50% 1.1x0.25 smd: 1(-2.75,2) 2(-2.75,1.5) 3(-2.75,1) 4(-2.75,0.5) 5(-2.75,0) 6(-2.75,-0.5) 7(-2.75,-1) 8(-2.75,-1.5) 9(-2.75,-2) 19(2.75,-2) 20(2.75,-1.5) 21(2.75,-1) 22(2.75,-0.5) 23(2.75,0) 24(2.75,0.5) 25(2.75,1) 26(2.75,1.5) 27(2.75,2)
  rrect50% 0.25x1.1 smd: 10(-2,-2.75) 11(-1.5,-2.75) 12(-1,-2.75) 13(-0.5,-2.75) 14(0,-2.75) 15(0.5,-2.75) 16(1,-2.75) 17(1.5,-2.75) 18(2,-2.75) 28(2,2.75) 29(1.5,2.75) 30(1,2.75) 31(0.5,2.75) 32(0,2.75) 33(-0.5,2.75) 34(-1,2.75) 35(-1.5,2.75) 36(-2,2.75)
  rrect10% 3x3 smd: 37(0,0)
  silkscreen extent -3.98,-3.21 3.21,3.21, body extent -3.08,-3.08 3.08,3.08, height 1
"TDK 4-PC Pad" [mm]
  rrect50% 1.35x0.9 smd: 1(0,-2.5) 2(0,0) 3(4.55,0) 4(4.55,-2.5)
  silkscreen extent -1,-3.2 5.5,0.7, body extent -0.02,-2.82 4.48,0.38, height 2.8
"TH 2.54mm Header 1x3" [mm]
  rect 1.5x1.5 hole 0.9: 1(0,0)
  round 1.5 hole 0.9: 2(2.54,0) 3(5.08,0)
  silkscreen extent -1.27,-1.27 6.35,1.27, body extent -1.27,-1.27 6.35,1.27, height 9.5
"TH 2.54mm Header 1x4" [mm]
  rect 1.5x1.5 hole 0.9: 1(0,0)
  round 1.5 hole 0.9: 2(2.54,0) 3(5.08,0) 4(7.62,0)
  silkscreen extent -1.27,-1.27 8.89,1.27, body extent -1.27,-1.27 8.89,1.27, height 9.5
TI-SOIC-8 [mm]
  rrect50% 1.95x0.6 smd: 1(-5.25,1.905) 2(-5.25,0.635) 3(-5.25,-0.635) 4(-5.25,-1.905) 5(5.25,-1.905) 6(5.25,-0.635) 7(5.25,0.635) 8(5.25,1.905)
  silkscreen extent -5.37,-3 3.88,3, body extent -5.75,-3 5.75,3, height 2.8
TI_10_WSON [mm]
  rrect50% 0.85x0.25 smd: 1(-1.395,1) 2(-1.395,0.5) 3(-1.395,0) 4(-1.395,-0.5) 5(-1.395,-1) 6(1.395,-1) 7(1.395,-0.5) 8(1.395,0) 9(1.395,0.5) 10(1.395,1)
  rrect25% 1.54x2.4 smd: 11(0,0)
  silkscreen extent -2.13,-1.68 1.67,1.72, body extent -1.58,-1.53 1.58,1.53, height 0.8
TI_14_TSSOP [mm] "TSOP, 14-Leads, Body 5.00x4.40mm, Pitch 0.65mm, Thermal Pad 3.34x2.94mm, IPC Medium Density"
  rect 2.94x3.34 smd: 0(0,0)
  rect 1.4x0.45 smd: 1(-2.95,1.95) 2(-2.95,1.3) 3(-2.95,0.65) 4(-2.95,0) 5(-2.95,-0.65) 6(-2.95,-1.3) 7(-2.95,-1.95) 8(2.95,-1.95) 9(2.95,-1.3) 10(2.95,-0.65) 11(2.95,0) 12(2.95,0.65) 13(2.95,1.3) 14(2.95,1.95)
  silkscreen extent -3.07,-2.55 1.85,2.85, body extent -3.2,-2.55 3.2,2.55, height 1.2
"VISHAY DO-219" [mm]
  rrect50% 0.8x0.8 smd: A(1.9,0)
  rrect50% 2x1.1 smd: K(0,0)
  silkscreen extent -1.4,-0.72 2.7,0.7
WFQN-16 [mm]
  rect 0.8x0.25 smd: 1(-1.45,0.75) 2(-1.45,0.25) 3(-1.45,-0.25) 4(-1.45,-0.75) 9(1.45,-0.75) 10(1.45,-0.25) 11(1.45,0.25) 12(1.45,0.75)
  rect 0.25x0.8 smd: 5(-0.75,-1.45) 6(-0.25,-1.45) 7(0.25,-1.45) 8(0.75,-1.45) 13(0.75,1.45) 14(0.25,1.45) 15(-0.25,1.45) 16(-0.75,1.45)
  rect 1.68x1.68 smd: 17(0,0)
  silkscreen extent -2.48,-1.7 1.7,1.7, body extent -1.6,-1.6 1.6,1.6, height 0.8
"Wurth 4-PC Pad" [mm]
  rrect50% 2.7x2.7 smd: 1(7.62,6.22) 2(0,6.22) 3(0,0) 4(7.62,0)
  silkscreen extent -1.7,-1.8 9.4,8, body extent -1.19,-1.24 8.81,7.46, height 6.2

## Part data
ADC1: library part ADS7028IRTER, "IC ADC 12BIT SAR 16WQFN", Manufacturer="Texas Instruments", Complex IC=1, Digikey Link=https://www.digikey.com.au/en/products/detail/texas-instruments/ADS7028IRTER/12696020?s=N4IgTCBcDaIIIBEDKB2ADGAHASQEoBUBRXEAXQF8g, Digikey Part Number=ADS7028IRTER, Part Number=ADS7028IRTER
C1 C2 C4 C5 C10 C11 C12A C12B C12C C12D C13A C13B C13C C13D C15 C16 C17 C18 C19 C20 C23 C24 C25 C29 C32: library part GCM188L81H104KA57D, Digikey Part Number=490-6049-1-ND, Manufacturer=muRata, Rated Voltage=50V, Temperature Rating=X8L, Tolerance=±10%, Material=MLCC, Part Number=GCM188L81H104KA57D
C3 C30: library part GCM21BR71H105KA03L, Digikey Part Number=490-10675-1-ND, Manufacturer=muRata, Rated Voltage=50V, Temperature Rating=X7R, Tolerance=±10%, Material=MLCC, Part Number=GCM21BR71H105KA03L
C6 C7 C8 C9: library part GRM1885C1H101JA01D, Digikey Part Number=490-1427-1-ND, Manufacturer="Murata Electronics", Rated Voltage=50V, Temperature Rating="C0G, NP0", Tolerance=±5%, Material=MLCC, Part Number=GRM1885C1H101JA01D
C14A C14B C14C C14D: library part GCM188R71H223KA37J, Digikey Part Number=490-8022-2-ND, Manufacturer="Murata Electronics", Rated Voltage=50V, Temperature Rating=X7R, Tolerance=±10%, Material=MLCC, Part Number=GCM188R71H223KA37J
C21 C22 C33 C34 C35 C36: library part GRM21BR6YA106KE43L, Digikey Part Number=490-10514-6-ND, Manufacturer=muRata, Rated Voltage=50V, Temperature Rating=X5R, Tolerance=10%, Material=MLCC, Part Number=GRM21BR6YA106KE43L
C26: library part HHXA350ARA470MF61G, Part Number=HHXA350ARA470MF61G
C27 C28: library part GRM31CR71H475KA12K, Digikey Part Number=490-GRM31CR71H475KA12KTR-ND, Manufacturer="Murata Electronics", Rated Voltage=50V, Temperature Rating=X7R, Tolerance=±10%, Material=MLCC, Part Number=GRM31CR71H475KA12K
C31: library part GCM188L81H103KA03D, Digikey Part Number=490-GCM188L81H103KA03DCT-ND, Manufacturer=muRata, Rated Voltage=50V, Temperature Rating=X8L, Tolerance=±10%, Material=MLCC, Part Number=GCM188L81H103KA03D
D1A D1B D1C D1D: Breakdown Voltage=600V, Manufacturer="Vishay General Semiconductor - Diodes Division", Part Number=MSX1PJ-M3/89A
D2A D2B D2C D2D: library part SML-210FTT86, "Green LED Indication - Discrete 1.75V 0805 (2012 Metric)", Digikey Part Number=511-1285-1-ND, Manufacturer="ROHM Semiconductor", Colour=Green, Part Number=SML-210FTT86
D3 D4 D5: library part SML-211YTT86, "Yellow LED Indication - Discrete 1.75V 0805 (2012 Metric)", Digikey Part Number=511-1293-1-ND, Manufacturer="ROHM Semiconductor", Colour=Yellow, Part Number=SML-211YTT86
D6: Breakdown Voltage="100 V", Digikey Part Number=1727-PMEG100T10ELR-QXCT-ND, Forward Voltage="0.75 V @ 1A", Manufacturer="Nexperia USA Inc.", Rated Power="680 mW", Part Number=PMEG100T10ELR-QX
D7 D9 D10: library part SML-210LTT86, "Red LED Indication - Discrete 1.75V 0805 (2012 Metric)", Digikey Part Number=511-1286-1-ND, Manufacturer="ROHM Semiconductor", Colour=Red, Part Number=SML-210LTT86
D8: Breakdown Voltage="30.8 V", Digikey Part Number=497-10804-1-ND, Manufacturer=STMicroelectronics, Rated Power=600W, Forward Voltage="30.8 V", Part Number=SM6T36CAY
F1: "PTC RESET FUSE 60V 1A 292", Digikey Part Number=507-2070-1-ND, Manufacturer="Littelfuse Inc.", Digikey Link=https://www.digikey.com/product-detail/en/bel-fuse-inc/0ZCF0100AF2A/507-2070-1-ND/6210547, Part Number=0ZCF0100AF2A
ISO1: library part ADuM1401, "General Purpose Digital Isolator 2500Vrms 4 Channel 1Mbps 25kV/µs CMTI 16-SOIC (0.295\", 7.50mm Width)", Manufacturer="Analog Devices", Complex IC=0, Part Number=ADuM1401
ISO2: "General Purpose Digital Isolator 2500Vrms 4 Channel 1Mbps 25kV/µs CMTI 16-SOIC (0.295\", 7.50mm Width)", Digikey Part Number=ADUM1400WSRWZ-ND, Manufacturer="Analog Devices", Complex IC=0, Digikey Link=https://www.digikey.com/product-detail/en/analog-devices-inc/ADUM1400WSRWZ/ADUM1400WSRWZ-ND/1873713, Part Number=ADuM1400
L1 L3: library part RLS-126, Digikey Part Number=945-3429-ND, Manufacturer=Recom, Rated Current="0.8 A", Tolerance=0.2, Impedance=230mOhm, Material=Wirewound, Part Number=RLS-126
L2: library part SRN4018-4R7M, Digikey Part Number=SRN3015TA-4R7MCT-ND, Manufacturer=Bourns, Rated Current=1.9A, Tolerance=0.2, Impedance=84mOhms, Material=Wirewound, Part Number=SRN4018-4R7M
P1: library part "SMD 1.27mm Header 2x5 (3221-10-0300-00)", Angle=0, Contact=NA, Flange=No, Part Number="SMD 1.27mm Header 2x5 (3221-10-0300-00)", Pitch=1.27mm, Positions=10, Row Spacing=1.27mm
P2: library part "TH 2.54mm Header 1x3", Angle=0, Contact=NA, Flange=No, Part Number="TH 2.54mm Header 1x3", Pitch=2.54mm, Positions=3, Row Spacing=2.54mm
P3: library part "TH 2.54mm Header 1x4", Angle=0, Contact=NA, Flange=No, Part Number="TH 2.54mm Header 1x4", Pitch=2.54mm, Positions=4, Row Spacing=2.54mm
P4: Digikey Part Number=1734-1861-ND, Angle=90, Contact="Copper Alloy", Digikey Link=https://www.digikey.com/products/en?keywords=dtf13-12pa, Flange=No, Part Number=DTF13-12P, Pitch=4.45mm, Positions=12, Row Spacing=4.45mm
R1 R17: library part RC0603FR-07100KL, Manufacturer=YAGEO, Rated Power=0.1W, Tolerance=0.01, Material=FR-07, Part Number=RC0603FR-07100KL
R2A R2B R2C R2D R3A R3B R3C R3D R4A R4B R4C R4D R14 R15: library part RC0603FR-0710KL, Digikey Part Number=311-10.0KHRCT-ND, Manufacturer=YAGEO, Rated Power=0.1W, Tolerance=0.01, Material=FR-07, Part Number=RC0603FR-0710KL
R5A R5B R5C R5D: library part RC0805FR07390RL, Digikey Part Number=311-390CRCT-ND, Manufacturer=YAGEO, Rated Power=0.125W, Tolerance=0.01, Material=FR-07, Part Number=RC0805FR07390RL
R6A R6B R6C R6D: library part RC0603JR-13680RL, Digikey Part Number=13-RC0603JR-13680RLCT-ND, Manufacturer=YAGEO, Rated Power=0.1W, Tolerance=0.01, Material=FR-07, Part Number=RC0603JR-13680RL
R7A R7B R7C R7D R8A R8B R8C R8D R19: library part RC0603FR-071KL, Digikey Part Number=311-1.00KHRCT-ND, Manufacturer=YAGEO, Rated Power=0.1W, Tolerance=0.01, Material=FR-07, Part Number=RC0603FR-071KL
R9 R10 R11: library part RT0603BRD07500RL, Digikey Part Number=13-RT0603BRD07500RL-ND, Manufacturer=YAGEO, Rated Power=0.1W, Tolerance=0.01, Material=FR-07, Part Number=RT0603BRD07500RL
R12 R13: library part RC0805FR075K1L, Digikey Part Number=311-5.10KCRCT-ND, Manufacturer=YAGEO, Rated Power=0.125W, Tolerance=0.01, Material=FR-07, Part Number=RC0805FR075K1L
R16: library part RC0603FR-0720KL, Digikey Part Number=311-20.0KHRCT-ND, Manufacturer=YAGEO, Rated Power=0.1W, Tolerance=0.01, Material=FR-07, Part Number=RC0603FR-0720KL
R18: library part RC0603FR-072KL, Digikey Part Number=311-2.00KHRCT-ND, Manufacturer=YAGEO, Rated Power=0.1W, Tolerance=0.01, Material=FR-07, Part Number=RC0603FR-072KL
TP1: library part "SMD Test Point Small", Angle=0, Contact=NA, Flange=No, Part Number="SMD Test Point Small", Pitch=0mm, Positions=1, Row Spacing=0
U1: "IC CAN TRANSCEIVER 1/1 8SOIC", Digikey Part Number=296-ISO1042BQDWVQ1-ND, Manufacturer="Texas Instruments", Part Number=ISO1042
U2: Digikey Part Number=495-4598-1-ND, Manufacturer="EPCOS (TDK)", Rated Current=150mA, Impedance="5.8 kOhms @ 10MHz", Material=Wirewound, Part Number=B82787C0104H002
U3: "Dual Line CAN Bus Protector", Digikey Part Number=NUP2105LT1GOSCT-ND, Manufacturer="ON Semiconductor", Digikey Link=https://www.digikey.com/product-detail/en/on-semiconductor/NUP2105LT1G/NUP2105LT1GOSCT-ND/1485001, Part Number=NUP2105L
U4A U4B U4C U4D: "IC PWR SWTCH N-CHAN 1:1 14HTSSOP", Manufacturer="Texas Instruments", Complex IC=1, Part Number=TPS1H100AQPWPRQ1
U5: "ARM® Cortex®-M3 STM32F1 Microcontroller IC 32-Bit 72MHz 64KB (64K x 8) FLASH QFN", Manufacturer="ST Microelectronics", Digikey Link=https://www.digikey.com/en/products/detail/stmicroelectronics/stm32f103t8u6/1852493, Digikey Part Number=STM32F103T8U6, Part Number=STM32F103T8U6
U6: Digikey Part Number=732-1489-1-ND, Manufacturer="Wurth Electronics Inc", Rated Current="2.5 A", Impedance="460 Ohms @ 30MHz", Material=Wirewound, Part Number=744272121
U7: "DC DC CONVERTER 5V", Digikey Part Number=296-50359-1-ND, Input Voltage="4.5 to 36 V", Manufacturer="Texas Instruments", Output Current="1.0 A", Output Voltage=5V, Part Number=LM536015QDSXRQ1
U8: "DC DC CONVERTER 3.3V 1W", Input Voltage=5V, Manufacturer=Recom, Output Current=303mA, Output Voltage=3.3V, Part Number=RK-053.3S/H6
P5: Part Number=ATF13-08

## Via types
v1: diameter 0.5, hole 0.2, Signal Top to Signal Bottom, 36 vias
v2: diameter 0.55, hole 0.25, Signal Top to Signal Bottom, 34 vias

## Nets (pads, with @x,y where several pads share a name; then routed paths per layer and width w, separated by ;. In a path a pad name is that pad's centre, name@x,y a point inside that pad or via, vN(x,y) a via of type N, cw(c..) or ccw(c..) an arc to the next point about the centre after c; other vN are vias at no path point)
0V: ADC1.9 C1.1 C2.1 C3.1 C4.1 C6.1 C7.1 C8.1 C9.1 C11.1 C13A.1 C13B.1 C13C.1 C13D.1 C16.2 C21.1 C22.1 C23.1 C27.1 C28.1 C29.1 C30.1 C31.1 C33.1 C34.1 C35.1 D1A.K D1B.K D1C.K D1D.K ISO1.9 ISO1.15 ISO2.9 ISO2.15 R5A.1 R5B.1 R5C.1 R5D.1 R8A.1 R8B.1 R8C.1 R8D.1 R16.1 R18.1 U1.5 U3.3 U6.3 U7.5 U7.10 U7.11 U8.2 | length 60.7
  Signal Top w0.152: C11.1 34.53,76.7 35.646,76.7 v2(35.735,76.611) ISO1.9 ; C16.2 47.903,76.5 47.992,76.411 ISO2.9 ; C1.1 52.05,94.35 53.5,92.9 ADC1.9 ; U8.2 76.1,60.4 76.926,61.226 C35.1 ; v2(85.009,91.191) 85.009,91.225 85.8,92.016 C9.1 ; C7.1 v2(85.875,98.225) v2@85.9,98.2 ; U3.3 90.7,91.8 90.9,92 91.9,92 C8.1 v2(92,90.5) ; v2(92.2,98.4) C6.1
  Signal Bottom w0.152: C13D.1 26.2,86.623 26.997,85.826 R5D.1 ; v2(29.723,103.5) R8D.1 31.223,102.1 D1D.K ; C13C.1 37.803,86.597 v2(38.2,86.2) 38.6,85.8 R5C.1 ; v2(41.326,103.474) R8C.1 42.826,102.074 D1C.K ; C13B.1 57.539,82.261 v2(57.9,81.9) 58.008,81.9 58.308,81.6 R5B.1 ; v2(61.062,99.274) R8B.1 62.562,97.874 D1B.K ; C13A.1 69.177,82.323 69.974,81.526 R5A.1 ; v2(72.7,99.2) R8A.1 74.2,97.8 D1A.K
  other v2: 47.948,76.455 69.638,81.826 26.598,86.224
0V_(ISO): C5.1 C10.2 C15.2 C17.1 C18.1 C19.1 C20.1 C36.1 D4.K D5.K ISO1.2 ISO1.8 ISO2.2 ISO2.8 P1.5 P1.6 P2.1 P3.1 R19.1 U1.4 U5.5 U5.18 U5.26 U5.36 U8.5 | length 27.4
  Signal Top w0.152: D4.K 32.35,54.614 32.35,52.414 D5.K ; C20.1 36.208,47.837 36.334,47.837 U5.36 ; C19.1 37.248,43.648 U5.5 ; U5.26 41.184,49.726 41.978,50.52 41.978,52.922 C18.1 ; U5.18 44.178,45.65 46.05,45.65 C17.1 C17.1@46.799,46.399 ; v2(47.7,59.6) 48.5,60.4 C5.1 48,61 47.992,61.008 ISO2.8 ; v2(52.6,56.7) 52.6,56.702 U1.4 U1.4 ; U8.5 71.715,52.78 72.498,51.998 C36.1 72.51,50.712 R19.1@74.5,50.712
3V3: C5.2 C10.1 C15.1 C17.2 C18.2 C19.2 C20.2 C36.2 D10.A ISO1.1 ISO1.7 ISO2.1 P1.7 P1.8 P2.3 P3.4 R9.2 R12.2 R13.2 R14.2 U1.1 U5.1 U5.6 U5.19 U5.27 U8.7 | length 26.5
  Signal Top w0.152: ISO1.1 26.872,62.648 26.872,60.228 C10.1 ; C20.2 35.85,45.078 U5.1 ; C19.2 38.45,42.405 38.048,42.806 38.048,43.741 U5.6 ; ISO2.1 39.151,62.626 39.151,60.549 C15.1 ; C18.2 41.4,51.096 41.4,50.628 U5.27 ; U5.19 44.328,47.9 44.9,47.9 C17.2@45.65,47.15 ; R13.2@46.324,56.811 47.211,56.811 v2(48.1,57.7) ; v2(49,58.6) 49.698,59.298 C5.2 49.806,59.298 U1.1 ; R12.2@49.988,54.026 v2(50.889,54.926) ; U8.7 72.498,47.7 ; C36.2 72.498,47.7 ; D10.A@72.612,46.286 72.498,46.4 72.498,47.7
5V: ADC1.7 ADC1.10 C1.2 C2.2 C4.2 C11.2 C16.1 C31.2 C33.2 C34.2 C35.2 D9.A ISO1.10 ISO1.16 ISO2.10 ISO2.16 L2.1 L3.2 R1.2 R17.1 U1.8 U7.4 | length 24.2
  Signal Top w0.152: C11.2@34.432,74.968 C11.2 ISO1.10 ; C16.1 46.711,74.789 46.711,72.389 ISO2.10 ; v2(50.45,89.95) R1.2 C1.2 52.85,92.65 53.1,92.4 ADC1.10 ; ADC1.7 56.1,96.9 C2.2@56.15,96.95 ; L3.2@73.375,65.7 L3.2@74.282,65.7 ; L3.2@74.282,65.85 75.106,65.026 76.513,65.026 C35.2 ; U7.4 100.8,52.1 101.5,52.8 C31.2
_CAN1_N: C8.2 U1.6 U2.3 U3.1 | length 45.1
  Signal Top w0.33: U1.6 61.703,67.603 63.621,67.603 89.035,93.017 89.035,93.087 89.484,93.537 89.718,93.537 89.95,93.769 89.95,93.831 89.718,94.063 89.49,94.063 89.275,94.278 89.275,95.19 89.275,96.482 89.468,96.675 U2.3
_CAN1_P: C9.2 U1.7 U2.4 U3.2 | length 44.4
  Signal Top w0.33: U1.7 59.718,67.223 60.648,68.153 61.475,68.153 63.393,68.153 88.289,93.048 88.289,93.322 88.263,93.347 88.263,93.587 U3.2 ; U2.4 88.532,96.675 88.725,96.482 88.725,94.963 88.725,94.278 88.51,94.063 88.282,94.063 U3.2@88.05,93.831
ADC_CS: ADC1.11 ISO1.14 R1.1 | length 40.2
  Signal Top w0.152: ISO1.14 29.385,74.285 29.4,74.3 29.4,79.8 30.402,80.802 45.698,80.802 52.15,87.255 R1.1 53.15,91.15 53.9,91.9 ADC1.11
BOOT0: P2.2 R15.1
CAN1_N: C6.2 P4.5 U2.2 | length 19.2
  Signal Top w0.33: P4.5 81.264,107.407 82.616,107.407 82.809,107.6 82.809,108.101 84.255,109.547 86.363,109.547 87.854,108.056 87.854,106.27 89.275,104.849 89.275,101.418 89.468,101.225 U2.2 90.287,101.262 92.162,101.262 C6.2
CAN1_P: C7.2 P4.4 U2.1 | length 17.3
  Signal Top w0.33: P4.4 84.904,107.407 83.552,107.407 83.359,107.6 83.359,107.874 84.483,108.997 86.135,108.997 87.304,107.829 87.304,106.042 88.725,104.621 88.725,101.418 88.532,101.225 U2.1 87.725,101.2 85.9,101.2 C7.2
CAN_RX_INDC: R11.2 U5.33 | length 5
  Signal Top w0.152: R11.2 37.925,50.78 37.325,50.18 37.325,48.968 U5.33
CAN_TX_INDC: R10.2 U5.32 | length 6.6
  Signal Top w0.152: R10.2 37.925,53.647 38.144,53.428 38.352,53.428 38.603,53.177 38.603,50.956 37.741,50.094 37.741,49.259 U5.32
DIAG_EN1: ADC1.4 R3D.1 | length 39.1
  Signal Top w0.152: 33.5,85.7 35.745,87.945 39.947,87.945 44.446,92.444 46.916,92.444 47.256,92.784 47.256,93.264 47.184,93.337 47.184,93.788 53.24,99.845 56.941,99.845 59.085,97.7 59.085,92.989 58.996,92.9 ADC1.4
DIAG_EN2: ADC1.6 R3C.1 | length 25.6
  Signal Top w0.152: 45.5,83.9 47.521,85.921 47.521,92.044 47.967,92.489 47.967,93.567 52.347,97.947 56.639,97.947 56.728,97.858 56.728,96.498 56.6,96.369 ADC1.6
DIAG_EN3: ADC1.2 R3B.1
DIAG_EN4: ADC1.16 R3A.1
GLV+: C12A.2 C12B.2 C12C.2 C12D.2 F1.1 P4.12 U4A.8 U4A.9 U4A.10 U4B.8 U4B.9 U4B.10 U4C.8 U4C.9 U4C.10 U4D.8 U4D.9 U4D.10 | length 115.5
  Int2 (PWR) w0.152: v2(36.523,87.1) 36.536,87.087 48.113,87.087 v2(48.126,87.074) 52.326,82.874 v2(67.862,82.874) 79.462,82.874 90.574,82.874 95.2,87.5 95.2,96.1 100.9,101.8 104.8,101.8 104.8,105.311 P4.12
  Signal Bottom w0.456: 20.848,86.975 20.873,87 ; U4D.9@35.248,91.175 35.248,87.125 C12D.2 v2(36.523,87.1) ; U4C.9 46.851,91.149 46.851,87.099 C12C.2 v2(48.126,87.074) ; U4B.9 66.587,86.949 66.587,82.899 C12B.2 v2(67.862,82.874) ; C12A.2 78.225,82.825 78.225,86.875 U4A.9
  other v2: 78.277,84.861
GLV-: C12A.1 C12B.1 C12C.1 C12D.1 C14A.1 C14B.1 C14C.1 C14D.1 C24.1 C25.1 C26.1 D2A.K D2B.K D2C.K D2D.K D8.K P4.1 P4.11 P5.1 P5.2 P5.3 P5.4 U6.4 | length 135.6
  Signal Top w0.152: P5.4 P5.3 P5.2 P5.1 50.737,109.463 v2(50.8,109.4)
  Int1 (GND) w0.152: v2(39.2,105.1) 39.213,105.087 50.79,105.087 v2(50.803,105.074) ; v2(50.8,109.4) 50.802,109.398 v2(50.803,105.074) ; P4.11 96.161,109.5 98,109.5 98.659,108.841 P4.1 98.5,106.843 98.5,102.2 ; v2(98.6,93.3) 98.5,93.4 98.5,102.2 ; v2(50.803,105.074) v2(50.803,105.074) 55.003,100.874 v2(70.539,100.874) 82.139,100.874 97.174,100.874 98.5,102.2
  Signal Bottom w0.152: v2@35.2,83.7 v2(35.223,83.723) C12D.1 ; C14D.1 37.2,105.064 D2D.K 39.174,105.126 v2(39.2,105.1) ; v2@46.803,83.674 v2(46.826,83.697) C12C.1 ; C14C.1 48.803,105.038 D2C.K 50.777,105.1 v2(50.803,105.074) ; v2@66.539,79.474 v2(66.562,79.497) C12B.1 ; C14B.1 68.539,100.838 D2B.K 70.513,100.9 v2(70.539,100.874) ; C12A.1 78.2,79.471 78.532,79.139 v2(78.532,79.091) ; C14A.1 80.177,100.764 D2A.K 82.151,100.826 v2(82.177,100.8) ; v2(98.6,93.3) 98.625,93.274 98.625,90.074 D8.K
HB: D3.K U5.34 | length 4.1
  Signal Top w0.152: D3.K 35.662,49.924 U5.34
HSD_EN1: ISO2.14 R2D.1
HSD_EN2: ISO2.13 R2C.1
HSD_EN3: ISO2.12 R2B.1
HSD_EN4: ISO2.11 R2A.1
HSD_EN_(ISO)_1: ISO2.3 U5.8
HSD_EN_(ISO)_2: ISO2.4 U5.9
HSD_EN_(ISO)_3: ISO2.5 U5.10
HSD_EN_(ISO)_4: ISO2.6 U5.15
NetADC1_8: ADC1.8 C3.2 | length 3.9
  Signal Top w0.152: C3.2 54.062,96.05 55.35,96.05 55.6,95.8 ADC1.8
NetC24_2: C24.2 D6.A D8.A F1.2
NetC30_2: C30.2 U7.3 | length 4.1
  Signal Top w0.152: U7.3 C30.2
NetC32_2: C32.2 U7.2 | length 4.9
  Signal Top w0.152: U7.2 100.7,51.1 100.9,50.9 100.9,49.2 101.4,48.7 C32.2
NetD1A_A: D1A.A R6A.1 R8A.2 U4A.0 U4A.2 | length 5.8
  Signal Bottom w0.152: R8A.2 D1A.A 74.4,95.1 75.65,93.85 U4A.2 ; U4A.0@75.65,91.15 v1(75.85,90.95)
  other v1: 75.85,88.75 76.95,88.75 78.05,88.75 75.85,89.85 76.95,89.85 78.05,89.85 76.95,90.95 78.05,90.95
NetD1B_A: D1B.A R6B.1 R8B.2 U4B.0 U4B.2 | length 5.8
  Signal Bottom w0.152: R8B.2 D1B.A 62.762,95.174 64.012,93.924 U4B.2 ; U4B.0@64.012,91.224 v1(64.212,91.024)
  other v1: 64.212,88.824 65.312,88.824 66.412,88.824 64.212,89.924 65.312,89.924 66.412,89.924 65.312,91.024 66.412,91.024
NetD1C_A: D1C.A R6C.1 R8C.2 U4C.0 U4C.2 | length 5.8
  Signal Bottom w0.152: R8C.2 D1C.A 43.026,99.374 44.276,98.124 U4C.2 ; U4C.0@44.276,95.424 v1(44.476,95.224)
  other v1: 44.476,93.024 45.576,93.024 46.676,93.024 44.476,94.124 45.576,94.124 46.676,94.124 45.576,95.224 46.676,95.224
NetD1D_A: D1D.A R6D.1 R8D.2 U4D.0 U4D.2 | length 5.8
  Signal Bottom w0.152: 18.273,91.25 18.473,91.05 ; R8D.2 D1D.A 31.423,99.4 32.673,98.15 U4D.2
  other v1: 32.873,93.05 33.973,93.05 35.073,93.05 32.873,94.15 33.973,94.15 35.073,94.15 32.873,95.25 33.973,95.25 35.073,95.25
NetD2A_A: D2A.A R7A.1 | length 3
  Signal Bottom w0.152: R7A.1@78.25,97.85 D2A.A@78.25,100.826
NetD2B_A: D2B.A R7B.1 | length 3
  Signal Bottom w0.152: R7B.1@66.612,97.924 D2B.A@66.612,100.9
NetD2C_A: D2C.A R7C.1 | length 3
  Signal Bottom w0.152: R7C.1@46.876,102.124 D2C.A@46.876,105.1
NetD2D_A: D2D.A R7D.1 | length 3
  Signal Bottom w0.152: R7D.1@35.273,102.15 D2D.A@35.273,105.126
NetD3_A: D3.A R9.1 | length 2.1
  Signal Top w0.152: R9.1 32.412,50 D3.A
NetD4_A: D4.A R10.1 | length 2.2
  Signal Top w0.152: D4.A 34.575,54.289 36.211,54.289 R10.1
NetD5_A: D5.A R11.1 | length 2.1
  Signal Top w0.152: D5.A 34.673,52.763 36.188,52.763 R11.1
NetD7_K: D7.K R16.2
NetD9_K: D9.K R18.2 | length 2.6
  Signal Top w0.152: D9.K 87.766,43.726 R18.2
NetD10_K: D10.K R19.2 | length 2.8
  Signal Top w0.152: D10.K@74.512,46.286 74.512,48.549 74.706,48.744 R19.2@74.706,49.012
NetISO1_3: ISO1.3 U5.20
NetISO1_4: ISO1.4 U5.13
NetISO1_5: ISO1.5 U5.12
NetISO1_6: ISO1.6 U5.14
NetL3_1: L3.1 U8.1 | length 4.4
  Signal Top w0.152: U8.1 69.615,62.65 72.825,62.65 L3.1@73.375,62.1
NetR2A_2: R2A.2 U4A.3 | length 3.4
  Signal Bottom w0.152: U4A.3 R2A.2@76.3,96.15
NetR2B_2: R2B.2 U4B.3 | length 3.4
  Signal Bottom w0.152: U4B.3 R2B.2@64.662,96.224
NetR2C_2: R2C.2 U4C.3 | length 3.4
  Signal Bottom w0.152: U4C.3 R2C.2@44.926,100.424
NetR2D_2: R2D.2 U4D.3 | length 3.4
  Signal Bottom w0.152: U4D.3 R2D.2@33.323,100.45
NetR3A_2: R3A.2 U4A.12 | length 4.1
  Signal Bottom w0.152: U4A.12 76.3,85.1 76.65,84.75 R3A.2@76.65,82.95
NetR3B_2: R3B.2 U4B.12 | length 4.1
  Signal Bottom w0.152: U4B.12 64.662,85.174 65.012,84.824 R3B.2@65.012,83.024
NetR3C_2: R3C.2 U4C.12 | length 4.1
  Signal Bottom w0.152: U4C.12 44.926,89.374 45.276,89.024 R3C.2@45.276,87.224
NetR3D_2: R3D.2 U4D.12 | length 4.1
  Signal Bottom w0.152: U4D.12 33.323,89.4 33.673,89.05 R3D.2@33.673,87.25
NetR4A_2: R4A.2 R5A.2 U4A.14 | length 5.6
  Signal Bottom w0.152: 73.45,82.45 R4A.2 74.35,84.75 75,85.4 U4A.14
NetR4B_2: R4B.2 R5B.2 U4B.14 | length 5.6
  Signal Bottom w0.152: 61.812,82.524 R4B.2 62.712,84.824 63.362,85.474 U4B.14
NetR4C_2: R4C.2 R5C.2 U4C.14 | length 5.6
  Signal Bottom w0.152: 42.076,86.724 R4C.2 42.976,89.024 43.626,89.674 U4C.14
NetR4D_2: R4D.2 R5D.2 U4D.14 | length 5.6
  Signal Bottom w0.152: 30.473,86.75 R4D.2 31.373,89.05 32.023,89.7 U4D.14
NetR6A_2: R6A.2 U4A.13 | length 4.1
  Signal Bottom w0.152: R6A.2@75.25,82.95 75.25,84.75 75.65,85.15 U4A.13
NetR6B_2: R6B.2 U4B.13 | length 4.1
  Signal Bottom w0.152: R6B.2@63.612,83.024 63.612,84.824 64.012,85.224 U4B.13
NetR6C_2: R6C.2 U4C.13 | length 4.1
  Signal Bottom w0.152: R6C.2@43.876,87.224 43.876,89.024 44.276,89.424 U4C.13
NetR6D_2: R6D.2 U4D.13 | length 4.1
  Signal Bottom w0.152: R6D.2@32.273,87.25 32.273,89.05 32.673,89.45 U4D.13
NetR12_1: R12.1 U1.3 U5.23 | length 16.5
  Signal Top w0.152: U5.23 46.3,52.7 46.8,52.7 47.4,53.3 ; R12.1 48.3,52.4 47.4,53.3 ; U1.3 47.4,53.3
NetR13_1: R13.1 U1.2 U5.24 | length 16.4
  Signal Top w0.152: U5.24 45.9,53.007 45.9,53.596 46.502,54.198 ; R13.1 45.636,55.064 46.502,54.198 ; U1.2 46.502,54.198
NetR15_2: R15.2 U5.35
NetR17_2: R17.2 U7.6 | length 2.3
  Signal Top w0.152: U7.6 R17.2
NetU5_30: U5.30
NRST: P1.1 R14.1 U5.4 | length 4.4
  Signal Top w0.152: R14.1 35.95,43.625 36.786,44.461 37.354,44.461 U5.4
SCLCK: ADC1.13 ISO1.12 | length 35.5
  Signal Top w0.152: ISO1.12 31.925,78.625 33.1,79.8 45.7,79.8 55.6,89.7 ADC1.13
SDI: ADC1.14 ISO1.11 | length 34.4
  Signal Top w0.152: ISO1.11 33.195,77.995 34.545,79.345 45.845,79.345 56.1,89.6 ADC1.14
SDO: ADC1.12 ISO1.13 | length 37.5
  Signal Top w0.152: ISO1.13 30.655,78.955 32.1,80.4 45.798,80.4 52.9,87.502 52.9,90.1 54.2,91.4 ADC1.12
SNS1: ADC1.3 C13D.2 R4D.1 | length 47.9
  Signal Top w0.152: 28.6,88.3 39.8,88.3 43.896,92.396 43.896,95.464 44.236,95.804 47.304,95.804 51.7,100.2 57.088,100.2 59.44,97.848 59.44,92.842 58.998,92.4 ADC1.3
  Signal Bottom w0.152: C13D.2 R4D.1
SNS2: ADC1.5 C13C.2 R4C.1 | length 28.9
  Signal Top w0.152: 41.502,88.998 43.47,88.998 46.561,92.089 47.064,92.089 47.611,92.636 47.611,93.411 47.539,93.484 47.539,93.641 53.387,99.49 56.794,99.49 57.1,99.183 ADC1.5
  Signal Bottom w0.152: C13C.2 R4C.1
SNS3: ADC1.1 C13B.2 R4B.1 | length 2.6
  Signal Bottom w0.152: C13B.2 R4B.1
SNS4: ADC1.15 C13A.2 R4A.1 | length 2.6
  Signal Bottom w0.152: C13A.2 R4A.1
SWCLK: P1.4 U5.28
SWDIO: P1.2 U5.25
Switch: C32.1 L2.2 U7.1 | length 12.7
  Signal Top w0.152: L2.2 105.425,46.925 105.8,47.3 105.8,48.3 105.4,48.7 C32.1
  Signal Top w0.254: U7.1 99.33,48.07 100.475,46.925 L2.2
UART_RX: P3.2 U5.22
UART_TX: P3.3 U5.21
VBAT_C: C21.2 L1.2 U6.2
VBAT_D: C25.2 C26.2 D6.K U6.1
VBAT_F: C22.2 C23.2 C27.2 C28.2 C29.2 D7.A L1.1 U7.7 U7.8 U7.9 | length 4
  Signal Top w0.152: 95.1,52.3 95.3,52.1 U7.7 ; 95.3,51.1 U7.9 ; 95.3,51.7 95.4,51.6 U7.8
VOUT_1: C14A.2 P5.8 R7A.2 U4A.5 U4A.6 U4A.7 | length 5.2
  Signal Bottom w0.456: U4A.6 R7A.2 C14A.2
VOUT_2: C14B.2 P5.7 R7B.2 U4B.5 U4B.6 U4B.7 | length 5.2
  Signal Bottom w0.456: U4B.6 R7B.2 C14B.2
VOUT_3: C14C.2 P5.6 R7C.2 U4C.5 U4C.6 U4C.7 | length 29.5
  Signal Bottom w0.152: P5.6 43,113.869 43,110.3 46.5,106.8 50.4,106.8 51.408,105.792 51.408,101.308 50.435,100.335 C14C.2
  Signal Bottom w0.456: U4C.6 R7C.2 C14C.2
VOUT_4: C14D.2 P5.5 R7D.2 U4D.5 U4D.6 U4D.7 | length 24.3
  Signal Bottom w0.152: P5.5 36.498,116.002 38.7,113.8 38.7,109.4 40.2,107.9 40.2,102.3 38.311,100.411 37.25,100.411 C14D.2
  Signal Bottom w0.456: U4D.6 R7D.2 C14D.2
pads on no net: ADC1.17 ISO2.7 P1.3 P1.9 P1.10 P4.0 P4.2 P4.3 P4.6 P4.7 P4.8 P4.9 P4.10 TP1.1 U4A.1 U4A.4 U4A.11 U4B.1 U4B.4 U4B.11 U4C.1 U4C.4 U4C.11 U4D.1 U4D.4 U4D.11 U5.2 U5.3 U5.7 U5.11 U5.16 U5.17 U5.29 U5.31 U5.37
copper on no net: | length 360
  Signal Top w0.254: 24.8,124.6 112.43,124.6 cw(c112.43,123.33) 113.7,123.33 113.7,39.249 113.551,39.1 18.749,39.1 18.6,39.249 18.6,123.33 cw(c19.87,123.33) 19.87,124.6 24.87,124.6

## Polygon pours and split planes (outlines as drawn)
VBAT_F on Signal Top "5V_TOP_1" (solid, pour order 16): 80.8,52.5 80.8,50.6 81.1,50.3 84.6,50.3 85.4,51.1 88.5,51.1 89,50.6 95.6,50.6 95.6,55.6 94.9,56.3 91.2,56.3 91,56.1 87.8,56.1 87.6,56.3 86,56.3 85.4,55.7 85.4,53.2 85,52.8 81.1,52.8
5V on Signal Top "5V_TOP_1" (solid, pour order 17): 98.2,45.7 98.2,41.8 98.4,41.6 100.7,41.6 101.8,42.7 104.8,42.7 105.1,43 105.1,44.7 104.9,44.9 101,44.9 100,45.9 98.4,45.9
0V_(ISO) on Int1 (GND) "NONET_L-01_P-001" (solid, pour order 23): 24.5,63.9 24.5,39.2 76.7,39.2 76.7,53.7 60.109,53.7 49.8,63.9
3V3 on Int2 (PWR) "NONET_L-01_P-001" (solid, pour order 22): 24.5,63.9 24.5,39.2 76.7,39.2 76.7,53.7 60.109,53.7 49.8,63.9

## Keep-outs
Int1 (GND):
  region: 108.7,124.6 108.7,30 115.7,30 115.7,124.6 110,124.6
  region: 24.8,124.6 24.8,30 15.4,30 15.4,124.6 22.7,124.6

## Other copper
Signal Bottom:
  region net GLV+: 21.723,86.3 20.023,86.3 20.023,87.7 21.723,87.7
  region net NetD1D_A: 18.423,92.2 19.123,91.4 22.123,91.4 22.123,88.5 17.023,88.5 17.023,91.4 17.523,91.4 18.123,92.2
  region net VOUT_4: 20.35,93.4 22.05,93.4 22.05,94.8 20.35,94.8

## Text inside footprints (layer, text, board x,y; h text height)
C26: Bottom Overlay "+" at 108.422,80.965 h0.38